# Allegro board PROIECT CAD 2-NEW.brd
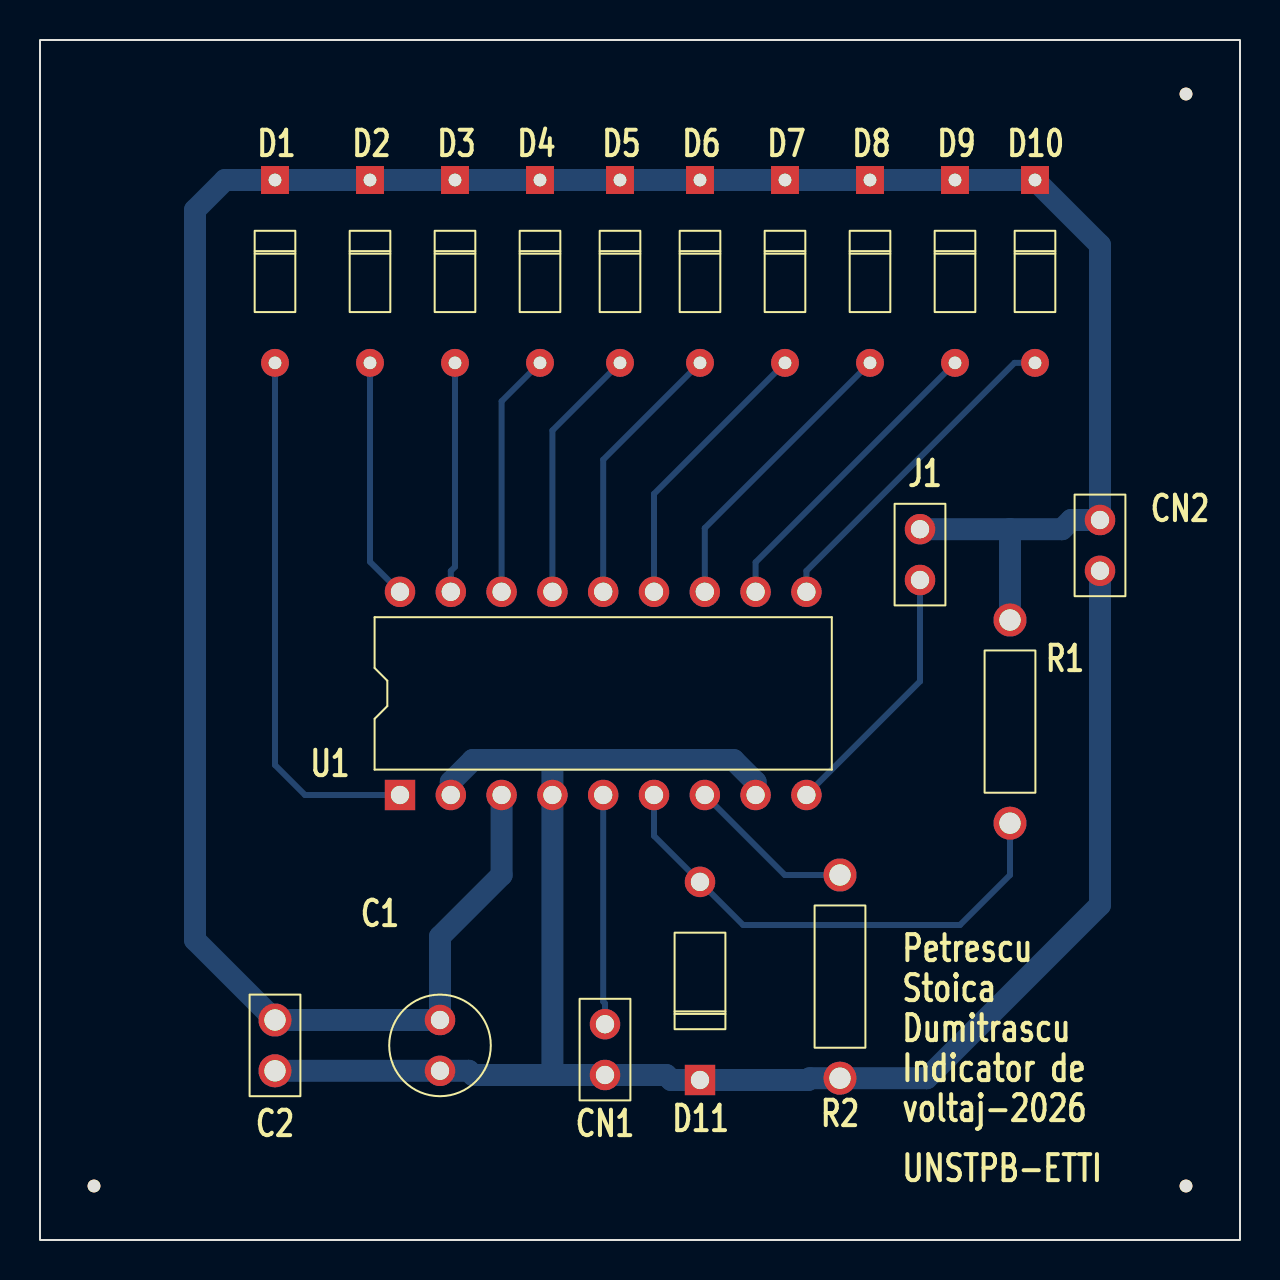
[diagram p0: board, top side]
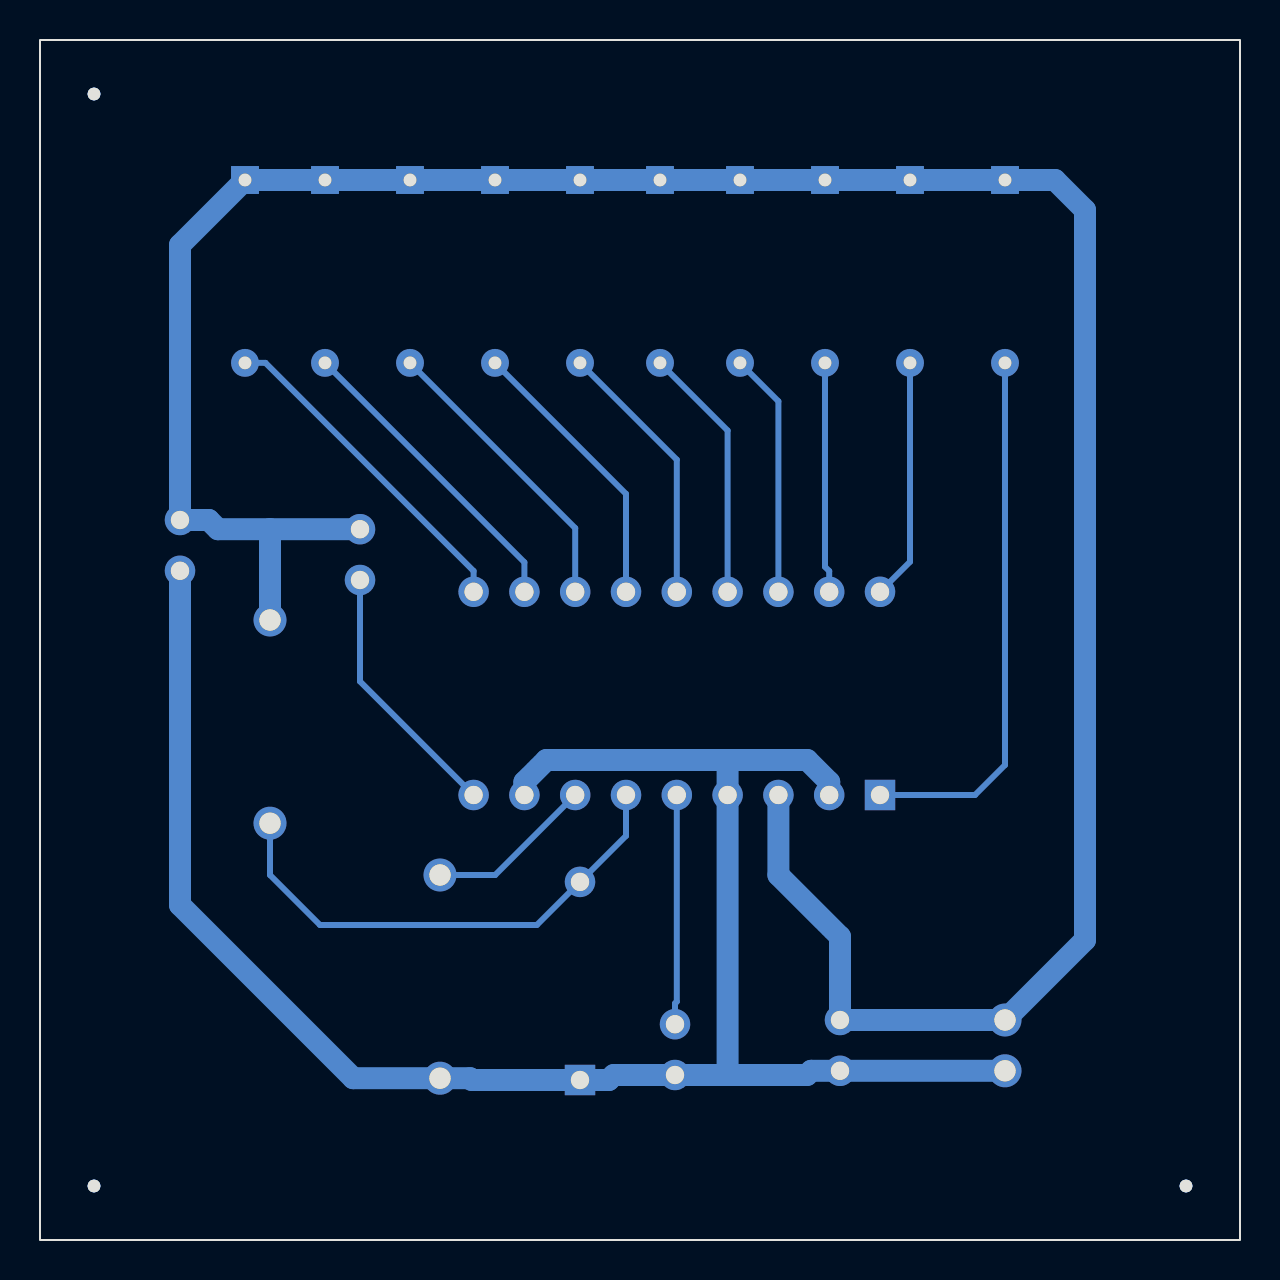
[diagram p1: board, bottom side, seen from below]

Outline 60 x 60 mm; copper layers: TOP, BOTTOM. Coordinates in mm from the lower left corner of the outline.
Outline path: rectangle 0,0 60,60

## Design rules (mm)
nets with their own width: min track width 0.3; nets N02197 N02280 N12880 N12887 N12899 N12911 N12923 N12930 N12934 N12941 N12948 N12955 N13488 N13540
nets with their own width: min track width 1.1; nets +V GND

## Placement (name value [footprint] x y rotation side)
C1  10uF/50V  [CAP196]  20 11 180 top
C2  100nF  [CAPCK05]  11.75 11 180 top
CN1  0-10 VDC  [JUMPER2]  28.25 8.25 90 top
CN2  12 VDC INPUT  [JUMPER2]  53 36 270 top
D1  YELLOW LED  [DO35]  11.75 53 180 top
D2  YELLOW LED  [DO35]  16.5 53 180 top
D3  YELLOW LED  [DO35]  20.75 53 180 top
D4  YELLOW LED  [DO35]  25 53 180 top
D5  YELLOW LED  [DO35]  29 53 180 top
D6  RED LED  [DO35]  33 53 180 top
D7  RED LED  [DO35]  37.25 53 180 top
D8  RED LED  [DO35]  41.5 53 180 top
D9  RED LED  [DO35]  45.75 53 180 top
D10  RED LED  [DO35]  49.75 53 180 top
D11  10 V  [DO41]  33 8 0 top
J1  JUMPER  [JUMPER2]  44 33 90 top
NOREF  -  []  0 60 0 top
NOREF#2  -  [unnamed#2]  57.3 2.7 0 top
NOREF#3  -  []  60 0 90 top
NOREF#4  -  [unnamed#2]  2.7 2.7 0 top
NOREF#5  -  [unnamed#2]  57.3 57.3 0 top
R1  1K  [RES400]  48.5 31 180 top
R2  1.2K  [RES400]  40 18.25 180 top
U1  LM3914  [DIP18_4]  18 22.25 90 top

## Library data of the parts
C1 = CAP POL
C2 = CAP NP
CN1 CN2 = CON2
D1-D10 = LED
D11 = DIODE ZENER
J1 = JUMPER
R1 R2 = R
U1 = LM3914BUN_1

## Footprints (pads in the part's own frame, mm; a bottom-side part is the same pattern mirrored in y, then rotated)
CAP196
  round 1.524 hole 0.914: 1(0,0) 2(0,2.54)
CAPCK05
  round 1.651 hole 1.067: 1(0,0) 2(0,2.54)
DIP18_4
  rect 1.524x1.524 hole 0.914: 1(0,0)
  round 1.524 hole 0.914: 2(0,-2.54) 3(0,-5.08) 4(0,-7.62) 5(0,-10.16) 6(0,-12.7) 7(0,-15.24) 8(0,-17.78) 9(0,-20.32) 10(10.16,-20.32) 11(10.16,-17.78) 12(10.16,-15.24) 13(10.16,-12.7) 14(10.16,-10.16) 15(10.16,-7.62) 16(10.16,-5.08) 17(10.16,-2.54) 18(10.16,0)
DO35
  rect 1.397x1.397 hole 0.635: 1(0,0)
  round 1.397 hole 0.635: 2(0,9.144)
DO41
  rect 1.524x1.524 hole 0.914: 1(0,0)
  round 1.524 hole 0.914: 2(0,9.906)
JUMPER2
  round 1.524 hole 0.914: 1(0,0) 2(2.54,0)
RES400
  round 1.651 hole 1.067: 1(0,0) 2(0,10.16)
unnamed#2
  round 0.635 hole 3.2 unplated: (0,0)

## Nets
GND: C1.2 C2.2 CN1.1 CN2.2 D11.1 R2.2 U1.2(V-) U1.4 U1.8
+V: C1.1 C2.1 CN2.1 D1.1 D2.1 D3.1 D4.1 D5.1 D6.1 D7.1 D8.1 D9.1 D10.1 J1.2 R1.1 U1.3
N02197: J1.1 U1.9
N02280: D11.2(CATHODE) R1.2 U1.6
N12880: D10.2(CATHODE) U1.10
N12887: D9.2(CATHODE) U1.11
N12899: D8.2(CATHODE) U1.12
N12911: D7.2(CATHODE) U1.13
N12923: D6.2(CATHODE) U1.14
N12930: D5.2(CATHODE) U1.15
N12934: D4.2(CATHODE) U1.16
N12941: D3.2(CATHODE) U1.17
N12948: D2.2(CATHODE) U1.18
N12955: D1.2(CATHODE) U1.1
N13488: R2.1 U1.7
N13540: CN1.2 U1.5

## Routing (per net, layer and track width the routed paths; a pad name or vN(x,y) marks a point on that pad's centre or on a via; arc(x,y) is an arc through that point)
GND: length 95
  BOTTOM w1.1: CN2.2 53,16.75 44.34,8.09 R2.2 38.5,8.09 38.41,8 D11.1 31.56,8 31.31,8.25 CN1.1 25.62,8.25 ; 25.62,8.25 21.65,8.25 21.44,8.46 C1.2 C2.2 ; 25.62,8.25 U1.4 25.62,24 ; U1.2 20.54,22.9 21.64,24 25.62,24 ; 25.62,24 34.68,24 35.78,22.9 U1.8
+V: length 137.6
  BOTTOM w1.1: R1.1 48.5,35.54 ; 48.5,35.54 J1.2 ; 48.5,35.54 51.1,35.54 51.56,36 CN2.1 53,49.75 D10.1 D9.1 D8.1 D7.1 D6.1 D5.1 D4.1 D3.1 D2.1 D1.1 9.25,53 7.75,51.5 7.75,15 C2.1 C1.1 20,15.17 23.08,18.25 U1.3
N02197: length 13.1
  BOTTOM w0.3: J1.1 44,27.93 U1.9
N02280: length 25.3
  BOTTOM w0.3: R1.2 48.5,18.25 46,15.75 35.16,15.75 D11.2 30.7,20.21 U1.6
N12880: length 16.8
  BOTTOM w0.3: D10.2 48.73,43.86 38.32,33.45 U1.10
N12887: length 15.6
  BOTTOM w0.3: U1.11 35.78,33.89 D9.2
N12899: length 14.9
  BOTTOM w0.3: U1.12 33.24,35.6 D8.2
N12911: length 14.2
  BOTTOM w0.3: D7.2 30.7,37.31 U1.13
N12923: length 13.5
  BOTTOM w0.3: D6.2 28.16,39.02 U1.14
N12930: length 12.8
  BOTTOM w0.3: U1.15 25.62,40.48 D5.2
N12934: length 12.2
  BOTTOM w0.3: D4.2 23.08,41.94 U1.16
N12941: length 11.5
  BOTTOM w0.3: U1.17 20.54,33.45 20.75,33.66 D3.2
N12948: length 12.1
  BOTTOM w0.3: U1.18 16.5,33.91 D2.2
N12955: length 27
  BOTTOM w0.3: D1.2 11.75,23.75 13.25,22.25 U1.1
N13488: length 8.4
  BOTTOM w0.3: U1.7 37.24,18.25 R2.1
N13540: length 11.5
  BOTTOM w0.3: CN1.2 28.25,11.83 28.16,11.92 U1.5

## Text on the board
Ref Des/Assembly Top: D1 | C2 | D2 | C1 | D3 | U1 | D4 | CN1 | D5 | D6 | D11 | D7 | R2 | D8 | J1 | D9 | R1 | D10 | CN2
Ref Des/Silkscreen Top: Petrescu | Stoica | Dumitrascu | Indicator de | voltaj-2026 | UNSTPB-ETTI
XSECTION_CHART: *  SURFACE | L1 TOP CONDUCTOR | *  DIELECTRIC | L2 BOTTOM CONDUCTOR | DESIGN CROSS SECTION CHART | ___________________________ | TOTAL THICKNESS 0.26416 MM | 1-2
DIMENSION: FIGURE | FINISHED_SIZE | 0.635 | 0.9144 | 1.0668 | 3.2 | DRILL CHART: TOP to BOTTOM | ALL UNITS ARE IN MILLIMETERS | PLATED | NON-PLATED | QTY | 20 | 28 | 6 | 3
